# Altium PCB PCB_RocketBoardV4_2025-05-21.pcbdoc
Units mil, origin at the board's own origin, x right, y up, seen from the top; angles counter-clockwise.
Board outline 3355 x 3020 mil, 2 copper layers (Top Layer, Bottom Layer); 46 components, 75 nets, 225 pads, 69 vias.
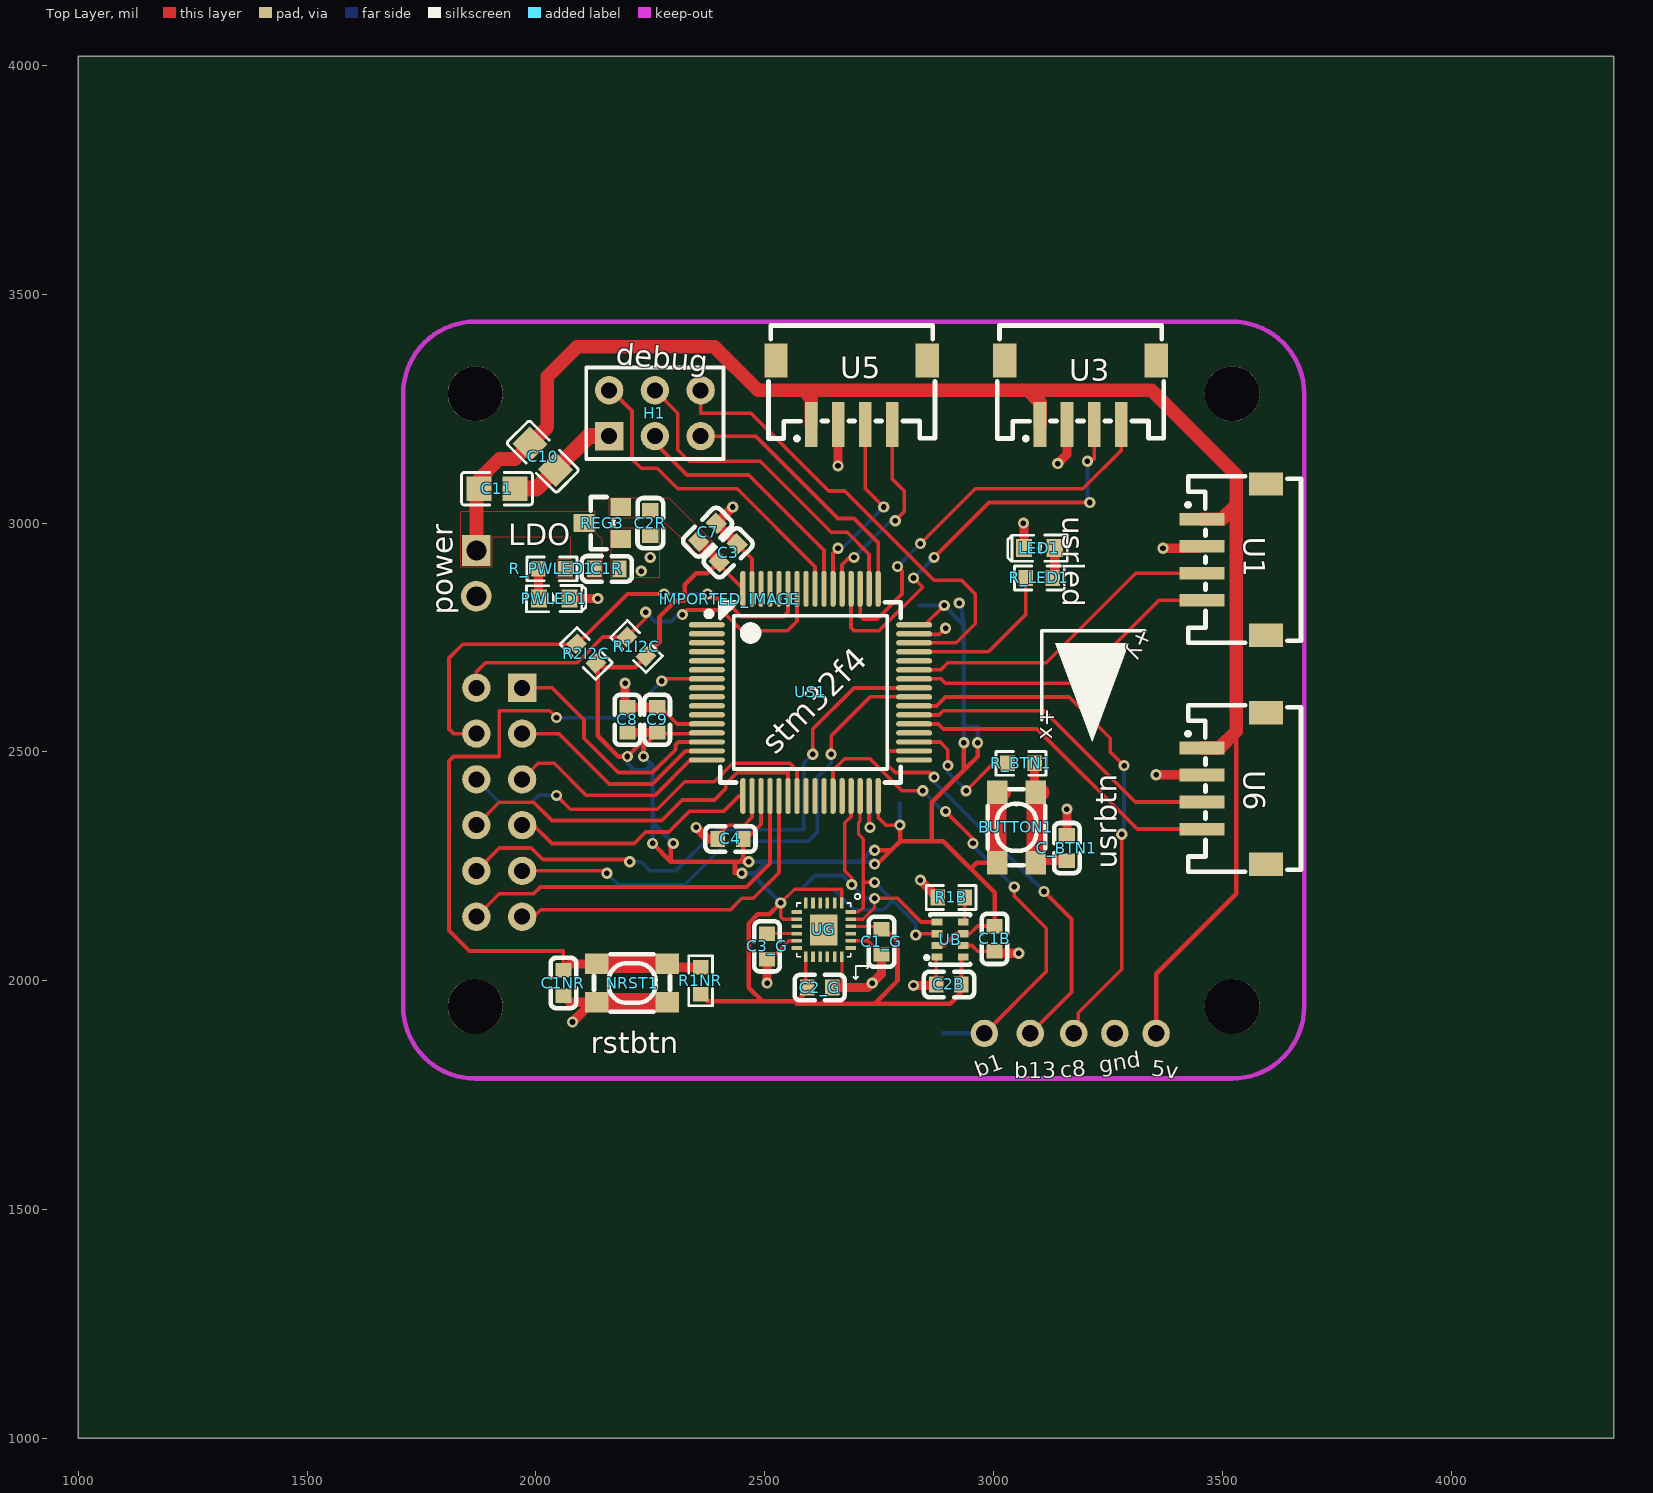
[diagram p0: Top Layer view]
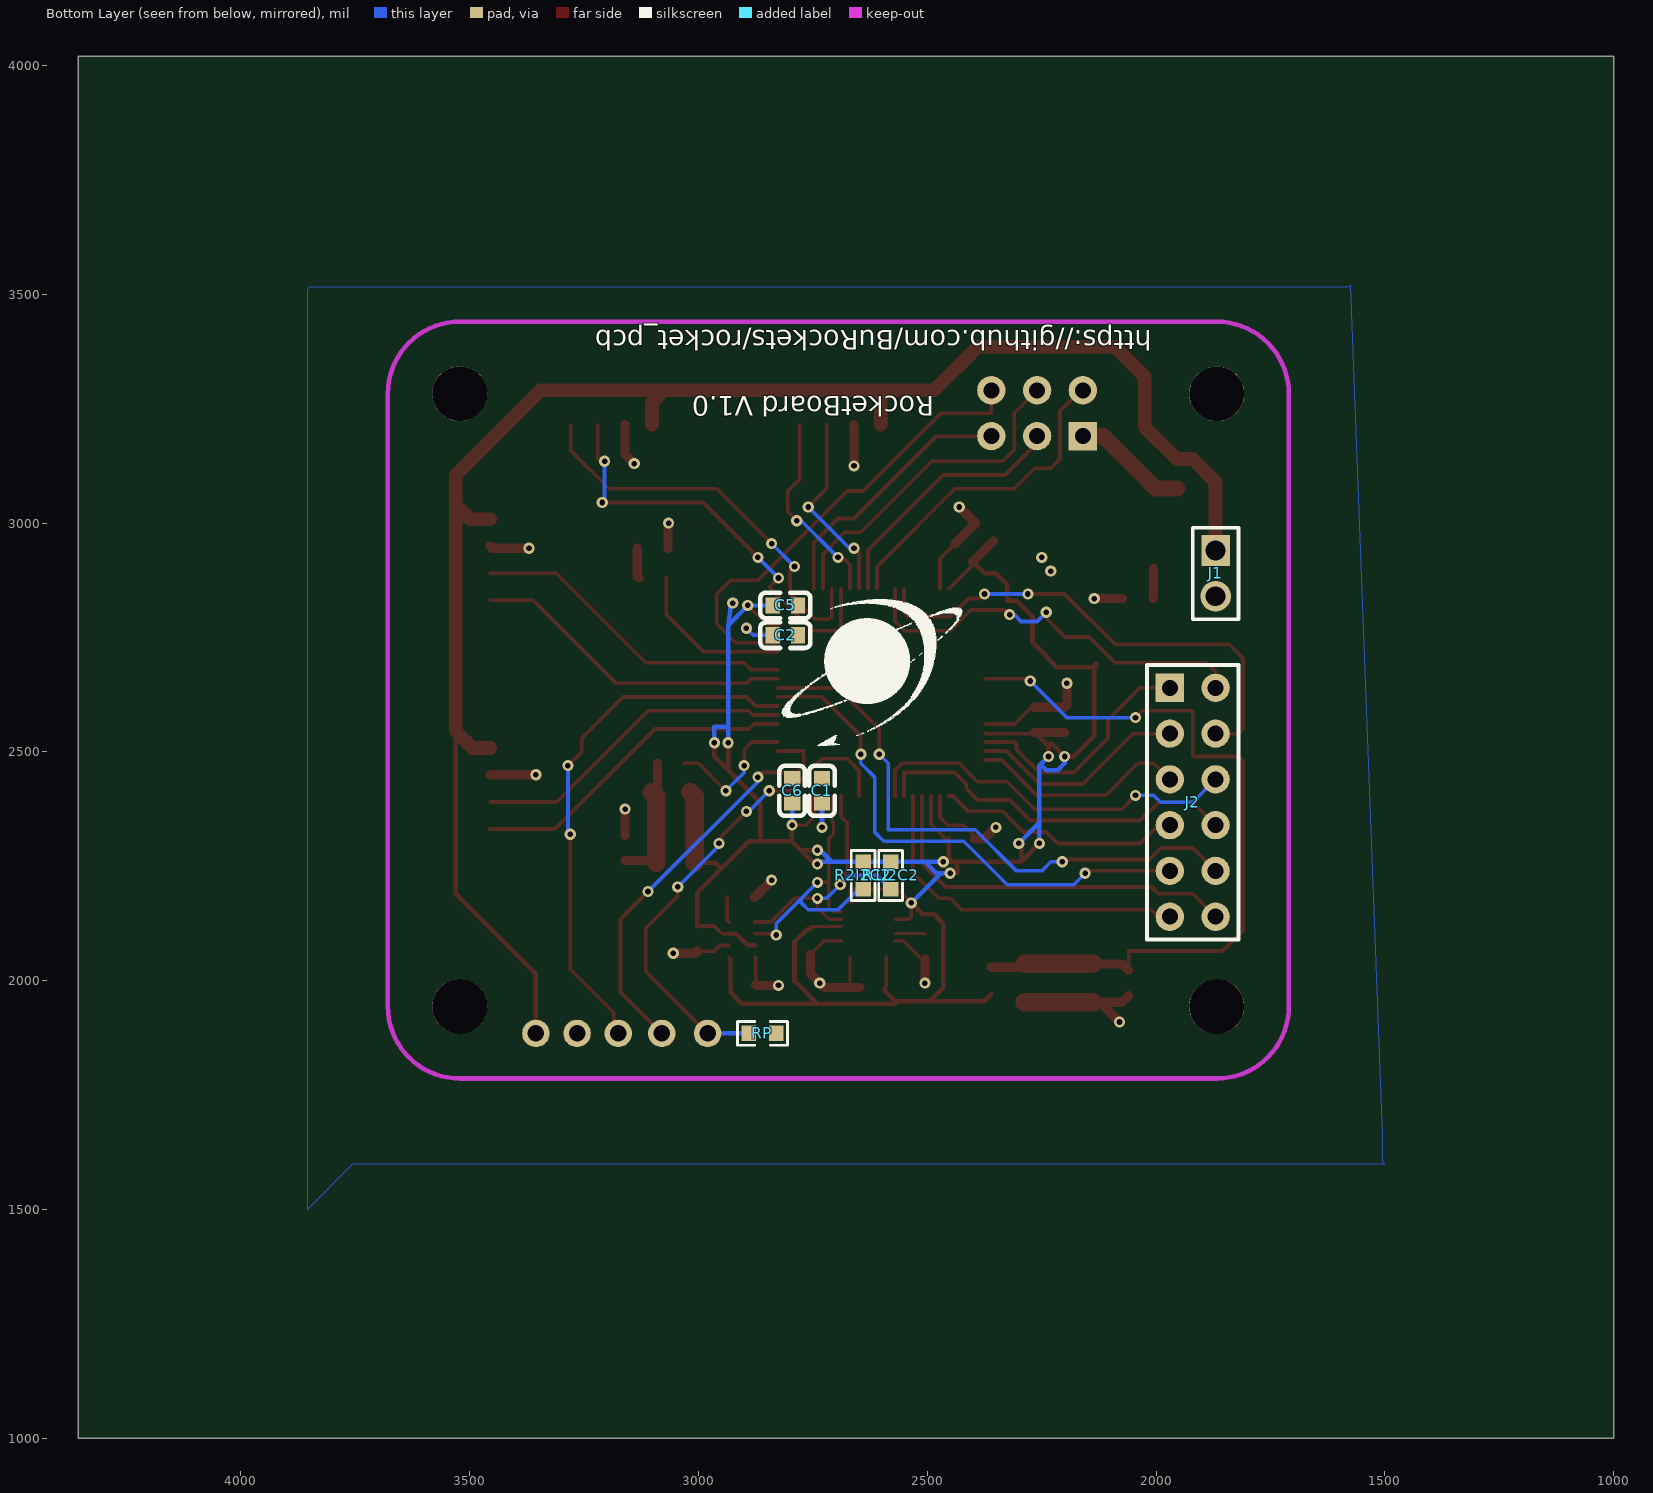
[diagram p1: Bottom Layer view, seen from below]

## Layer stack, top to bottom
Top Layer: signal copper (thickness not stored)
Dielectric: dielectric 12.6, FR-4, Dk 4.8
Bottom Layer: signal copper (thickness not stored)

## Board outline
4355,1000 1000,1000 1000,4020 4355,4020

## Components (designator, comment, footprint, x,y, rotation, side; value= is the part's Value field where it differs from the comment)
BUTTON1 "DHT-4235A" SW4-SMD-4.2X3.2X2.5MM 3050,2335 r270 top
C1 "2.2u" C0603#1 2730,2415 r270 bottom
C1_G "10n" C0603#2 2755,2085 r270 top
C1B "0.1u" C0603#2 3002.17,2091.95 r90 top
C1NR "100n" C0603#2 2060,1995 r270 top
C1R "1u" C0603#2 2155.01,2900 r180 top
C2 "2.2u" C0603#1 2810,2755 r0 bottom
C2_G "0.1u" C0603#2 2620,1985 r180 top
C2B "0.1u" C0603#2 2902.17,1991.95 r180 top
C2R "1u" C0603#2 2250.01,3000 r90 top
C3 "0.1u" C0603#2 2420,2935 r45 top
C3_G "0.1u" C0603#2 2505,2075 r270 top
C4 "0.1u" C0603#2 2425,2310 r0 top
C5 "0.1u" C0603#1 2810,2820 r180 bottom
C6 "0.1u" C0603#1 2795,2415 r90 bottom
C7 "4.7u" C0603#2 2375,2980 r45 top
C8 "0.1u" C0603#2 2200,2570 r270 top
C9 "1u" C0603#2 2265,2570 r270 top
C10 "1u" C0805 2015,3145 r315 top
C11 "0.1u" C0805 1915,3075 r180 top
C_BTN1 "0.1u" C0603#2 3160,2290 r270 top
H1 "HDR-F-2.54_2x3" HDR-F-2.54_2X3 2260,3240 r0 top
IMPORTED_IMAGE "IMPORTED_IMAGE" IMPORTED_IMAGE 2423.93,2833.13 r0 top
J1 "HDR-M-2.54_1x2" HDR-M-2.54_1X2 1870,2890 r90 bottom
J2 "HDR-M-2.54_2x6" HDR-M-2.54_2X6 1920,2390 r90 bottom
LED1 "LED-0603_R" LED0603_RED 3100,2945 r180 top
NRST1 "DHT-4235A" SW4-SMD-4.2X3.2X2.5MM 2210,1995 r0 top
PWLED1 "LED-0603_R" LED0603_RED 2040.01,2835 r0 top
R1B "10k" R0603#1 2907.17,2181.95 r0 top
R1I2C "4k7" R0603#1 2220,2730 r315 top
R1I2C2 "4k7" R0603#2 2580,2230 r270 bottom
R1NR "10k" R0603#1 2360,2000 r90 top
R2I2C "4k7" R0603#1 2110,2715 r315 top
R2I2C2 "4k7" R0603#2 2640,2230 r270 bottom
R_BTN1 "1k" R0603#1 3060,2475 r0 top
R_LED1 "10k" R0603#1 3100,2880 r180 top
R_PWLED1 "10k" R0603#1 2035.01,2900 r180 top
REG3 "XC6206P332MR-G" SEEED-SOT-23 2145.01,3000 r90 top
RP "4.7k" R0603#2 2860,1885 r180 bottom
U1 "S4B-ZR-SM4A-TF(LF)(SN)" CONN-SMD_4P-P1.50_S4B-ZR-SM4A-TF-LF-SN 3525,2920 r270 top
U3 "S4B-ZR-SM4A-TF(LF)(SN)" CONN-SMD_4P-P1.50_S4B-ZR-SM4A-TF-LF-SN 3190,3285 r0 top
U5 "S4B-ZR-SM4A-TF(LF)(SN)" CONN-SMD_4P-P1.50_S4B-ZR-SM4A-TF-LF-SN 2690,3285 r0 top
U6 "S4B-ZR-SM4A-TF(LF)(SN)" CONN-SMD_4P-P1.50_S4B-ZR-SM4A-TF-LF-SN 3525,2420 r270 top
UB "BMP280" LGA-8_L2.5-W2.0-P0.65_AMP6127 2905.04,2090.01 r180 top
UG "MPU9250-V" MPU9250 2570,2170 r270 top
US1 "STM32F405RGT6" LQFP-64_L10.0-W10.0-P0.50-LS12.0-BL 2600,2630 r270 top

## Footprints (in the part's own frame and the unit in brackets; to place one, negate y for a bottom-side part, rotate by r counter-clockwise, add the part's x,y. Pads: shape width x height; smd on the part's side, far side on the other; paste and mask are expansions set on the pad)
C0603#1 [mm]
  rect 0.8x0.9 smd paste+0 mask+0.051: 1(0.7,0) 2(-0.7,0)
  silkscreen extent -1.39,-0.71 1.39,0.71
C0603#2 [mm]
  rect 0.8x0.9 smd paste+0 mask+0.051: 1(-0.7,0) 2(0.7,0)
  silkscreen extent -1.39,-0.71 1.39,0.71
C0805 [mm]
  rect 1.41x1.35 smd paste-100 mask+0.051: 1(-1,0) 2(1,0)
  silkscreen extent -1.96,-0.9 1.96,0.9
CONN-SMD_4P-P1.50_S4B-ZR-SM4A-TF-LF-SN [mm]
  rect 0.7x2.5 smd paste+0 mask+0.051: 1(-2.25,-1.775) 2(-0.75,-1.775) 3(0.75,-1.775) 4(2.25,-1.775)
  rect 1.3x1.9 smd paste+0 mask+0.051: 5(4.2,1.775) 6(-4.2,1.775)
  silkscreen extent -4.62,-2.64 4.62,3.72
HDR-F-2.54_2X3 [mil]
  rect 62x62 hole 35 paste+0 mask+2: 1(-100,-50)
  round 62 hole 35 paste+0 mask+2: 2(-100,50) 3(0,-50) 4(0,50) 5(100,-50) 6(100,50)
  silkscreen extent -150,-100 150,100
HDR-M-2.54_1X2 [mil]
  rect 66.93x62 hole 43.31 paste+0 mask+2: 1(50,-0.01)
  round 66.93 hole 43.31 paste+0 mask+2: 2(-50,-0.01)
  silkscreen extent -100,-50 100,50
HDR-M-2.54_2X6 [mil]
  rect 62x62 hole 35 paste+0 mask+2: 1(250,50)
  round 62 hole 35 paste+0 mask+2: 2(250,-50) 3(150,50) 4(150,-50) 5(50,50) 6(50,-50) 7(-50,50) 8(-50,-50) 9(-150,50) 10(-150,-50) 11(-250,50) 12(-250,-50)
  silkscreen extent -300,-100 300,100
IMPORTED_IMAGE [mil]
LED0603_RED [mm]
  rect 0.9x1 smd paste+0 mask+0.051: 1(-0.85,0) 2(0.85,0)
  silkscreen extent -1.54,-0.73 1.75,0.73
LGA-8_L2.5-W2.0-P0.65_AMP6127 [mm]
  rect 0.6x0.4 smd paste+0 mask+0.051: 1(0.725,0.975) 2(0.725,0.325) 3(0.725,-0.325) 4(0.725,-0.975) 5(-0.725,-0.975) 6(-0.725,-0.325) 7(-0.725,0.325) 8(-0.725,0.975)
  silkscreen extent -1.1,-1.4 1.4,1.4
LQFP-64_L10.0-W10.0-P0.50-LS12.0-BL [mm]
  oval 0.3x2 smd paste+0 mask+0.051: 1(-3.75,-5.75) 2(-3.25,-5.75) 3(-2.75,-5.75) 4(-2.25,-5.75) 5(-1.75,-5.75) 6(-1.25,-5.75) 7(-0.75,-5.75) 8(-0.25,-5.75) 9(0.25,-5.75) 10(0.75,-5.75) 11(1.25,-5.75) 12(1.75,-5.75) 13(2.25,-5.75) 14(2.75,-5.75) 15(3.25,-5.75) 16(3.75,-5.75) 33(3.75,5.75) 34(3.25,5.75) 35(2.75,5.75) 36(2.25,5.75) 37(1.75,5.75) 38(1.25,5.75) 39(0.75,5.75) 40(0.25,5.75) 41(-0.25,5.75) 42(-0.75,5.75) 43(-1.25,5.75) 44(-1.75,5.75) 45(-2.25,5.75) 46(-2.75,5.75) 47(-3.25,5.75) 48(-3.75,5.75)
  oval 2x0.3 smd paste+0 mask+0.051: 17(5.75,-3.75) 18(5.75,-3.25) 19(5.75,-2.75) 20(5.75,-2.25) 21(5.75,-1.75) 22(5.75,-1.25) 23(5.75,-0.75) 24(5.75,-0.25) 25(5.75,0.25) 26(5.75,0.75) 27(5.75,1.25) 28(5.75,1.75) 29(5.75,2.25) 30(5.75,2.75) 31(5.75,3.25) 32(5.75,3.75) 49(-5.75,3.75) 50(-5.75,3.25) 51(-5.75,2.75) 52(-5.75,2.25) 53(-5.75,1.75) 54(-5.75,1.25) 55(-5.75,0.75) 56(-5.75,0.25) 57(-5.75,-0.25) 58(-5.75,-0.75) 59(-5.75,-1.25) 60(-5.75,-1.75) 61(-5.75,-2.25) 62(-5.75,-2.75) 63(-5.75,-3.25) 64(-5.75,-3.75)
  silkscreen extent -5,-5.79 5,5
MPU9250 [mm]
  rect 0.599x0.2 smd paste+0 mask+0.051: 1(0,2.5) 2(0,2.1) 3(0,1.701) 4(0,1.299) 5(0,0.9) 6(0,0.499) 13(2.99,0.5) 14(2.99,0.9) 15(2.99,1.3) 16(2.99,1.7) 17(2.99,2.099) 18(2.99,2.501)
  rect 0.2x0.599 smd paste+0 mask+0.051: 7(0.5,0) 8(0.9,0) 9(1.3,0) 10(1.7,0) 11(2.099,0) 12(2.501,0) 19(2.5,2.99) 20(2.1,2.99) 21(1.701,2.99) 22(1.299,2.99) 23(0.9,2.99) 24(0.499,2.99)
  rect 1.7x1.54 smd paste+0 mask+0.051: P$25(1.5,1.5)
  silkscreen extent -0.51,0 4.23,4
R0603#1 [mil]
  rect 31.75x34.02 smd paste-3937.01 mask+2: 1(-29.66,-0.01) 2(29.65,-0.01)
  silkscreen extent -55,-26 55,26
R0603#2 [mil]
  rect 31.75x34.02 smd paste-3937.01 mask+2: 1(29.66,0) 2(-29.65,0)
  silkscreen extent -55,-26 55,26
SEEED-SOT-23 [mil]
  rect 40x45 smd paste+0 mask+2: 1(-35,-39.99) 2(35,-39.99) 3(0,40.01)
  silkscreen extent -57,-25 57,25
SW4-SMD-4.2X3.2X2.5MM [mil]
  rect 51.2x45.3 smd paste+0 mask+2: 1(-77,42) 2(77,42) 3(-77,-42) 4(77,-42)
  silkscreen extent -83,-63 83,63

## Free pads (board coordinates)
  round 60 hole 36 paste+0 mask+2: 1(2980,1885) 2(3080,1885) 3(3175,1885) 4(3265,1885) 5(3355,1885)
  round 120.08 hole 120.08 unplated paste+0: ""(1867.48,1943.94) ""(1867.48,3282.52) ""(3521.02,1943.94) ""(3521.02,3282.52)

## Via types
v1: diameter 24.41, hole 12.2, Top Layer to Bottom Layer, tented both sides, 69 vias

## Nets (pads, with @x,y where several pads share a name; then routed paths per layer and width w, separated by ;. In a path a pad name is that pad's centre, name@x,y a point inside that pad or via, vN(x,y) a via of type N, cw(c..) or ccw(c..) an arc to the next point about the centre after c; other vN are vias at no path point)
+5V: C1R.2 C10.1 C11.2 J1.1 pad.5 R_PWLED1.1 REG3.3 U1.1 U3.1 U5.1 U6.1 | length 3750.5
  Top Layer w10: pad.5 3355,2015 3530,2190 3530,2545
  Top Layer w30: J1.1 1870,3090 1920,3140 1955,3140 2025,3210 2025,3320 2090,3385 2390,3385 2485,3290 2585,3290 ; U5.1 2601.4,3273.6 2585,3290 ; U3.1 3101.4,3263.6 3075,3290 ; U6.1 3493.6,2508.6 3530,2545 3530,3040 ; U1.1 3498.6,3008.6 3530,3040 ; 2585,3290 3075,3290 ; 3075,3290 3345,3290 3530,3105 3530,3040
A11: US1.44
ADC1IN4: J2.12 US1.20 | length 836.9
  Top Layer w8: J2.12 1920,2190 1995,2190 2010,2205 2460,2205 2511.42,2256.42 US1.20
ADC1IN10: US1.8
B0: US1.26
B1: pad.1 RP.2 US1.27 | length 1082.1
  Top Layer w8: US1.27 2649.21,2455 2649.21,2459.21 2675,2485 2730,2485 2800,2415 v1(2845,2415) ; v1(2895,2370) 2955,2310 v1(2955,2300) ; pad.1 3115,2020 3115,2115 3045,2185 v1(3045,2205)
  Bottom Layer w8: v1(2845,2415) 2890,2370 v1(2895,2370) ; v1(2955,2300) 2955,2295 v1(3045,2205)
  Bottom Layer w10: RP.2 pad.1
B2: US1.28
B5: US1.57
B8: US1.61
B9: US1.62
B12: US1.33
B13: pad.2 US1.34 | length 920.3
  Top Layer w8: US1.34@2826.37,2502.05 2770,2502.05 2770,2470 2785,2455 2860,2455 v1(2870,2445) ; pad.2 3170,1975 3170,2135 v1(3110,2195)
  Bottom Layer w8: v1(2870,2445) 2870,2435 v1(3110,2195)
B15: US1.36
BTN: R_BTN1.1 US1.35 | length 302.3
  Top Layer w8: US1.35 2883.3,2521.7 2900,2505 v1(2900,2470) ; v1(2940,2415) 3000,2475 R_BTN1.1
  Bottom Layer w8: v1(2900,2470) 2900,2455 v1(2940,2415)
C1: US1.9
C1_1: C1.1 US1.31 | length 123.1
  Top Layer w8: US1.31@2727.9,2403.6 2727.9,2335 v1(2730.01,2335)
  Bottom Layer w10: v1(2730.01,2335) C1.1
C2: US1.10
C2_1: C2.1 US1.47 | length 138.1
  Top Layer w8: US1.47@2826.37,2757.95 2827.32,2757 2879,2757 2882,2757 v1(2895,2770)
  Bottom Layer w8: C2.1 2880,2755 v1(2895,2770)
C3: US1.11
C4: US1.24
C5: US1.25
C8: pad.3 US1.39 | length 1177
  Top Layer w8: US1.39 2875.47,2600.47 2895,2620 3165,2620 3255,2530 3255,2500 v1(3285,2470) ; pad.3 3185,1895 3185,1930 3280,2025 v1(3280,2320)
  Bottom Layer w8: v1(3280,2320) 3285,2325 v1(3285,2470)
C15: US1.4
GND: C1.2 C1_G.2 C1B.1 C1NR.2 C1R.1 C2.2 C2_G.1 C2B.2 C2R.1 C3.2 C3_G.2 C4.1 C5.1 C6.1 C7.2 C8.1 C9.1 C10.2 C11.1 C_BTN1.1 H1.1 J1.2 LED1.2 NRST1.3 NRST1.4 pad.4 PWLED1.2 R1B.1 REG3.1 RP.1 U1.2 U3.2 U5.2 U6.2 UB.1 UB.7 UG.11 UG.18 UG.20 US1.12 US1.18 US1.63 | length 2526.6
  Top Layer w7: C3_G.2@2505,2047.4 2512.4,2047.4 2552.4,2087.4 UG.11 ; C2_G.1 2668.5,1985 UG.18@2668.5,2052.3 ; UG.20 2725.1,2087.3 C1_G.2@2755,2057.4
  Top Layer w8: C9.1 2272.44,2597.56 2308.9,2561.1 US1.12 ; C4.1 2397.4,2317.4 2420,2340 2455,2340 2472.1,2357.1 US1.18@2472.1,2403.6 ; C3.2 2472.05,2921.93 US1.63@2472.05,2856.37 ; C2B.2 2874.61,2049.76 UB.1 ; UB.7@2933.54,2077.21 2952.79,2077.21 2965.61,2064.39 C1B.1
  Top Layer w20: C1NR.2 2074.44,1953 NRST1.3 2123,1953 v1(2080,1910) ; PWLED1.2 v1(2135,2835) ; v1(2195,2650) 2195,2602.56 C8.1 C9.1 ; v1(2350.01,2335) 2375.01,2310 C4.1 ; v1(2430.01,3035) C7.2 C3.2 ; v1(2505,1995) C3_G.2@2505,2047.44 ; C2_G.1 2725,1985 v1(2734.8,1994.8) 2755,2015 C1_G.2@2755,2057.44 ; v1(2660,3125) 2660,3150 2660,3214.66 U5.2 ; v1(2825,1990) 2872.66,1990 C2B.2 ; v1(2840,2220) 2840,2219.46 R1B.1 ; C1B.1 3006.55,2060 v1(3055,2060) ; v1(3065,3000) 3066.54,2998.46 LED1.2 ; v1(3140,3130) 3160.46,3150.46 U3.2 ; C_BTN1.1 v1(3160,2375) ; v1(3355,2450) 3454.66,2450 U6.2 ; v1(3370,2945) 3450.58,2945 U1.2
  Top Layer w35: C11.1 2000.68,3075 C10.2 2115.68,3190 H1.1
  Top Layer w40: NRST1.3@2138,1953 NRST1.4
  other v1: 2230,2895 2250,2925
JTCK: H1.5 US1.49 | length 584.9
  Top Layer w8: H1.5 2480,3190 2660,3010 2695,3010 2747.6,2957.4 US1.49
JTDI: H1.4 US1.50 | length 738.7
  Top Layer w8: H1.4 2310,3240 2310,3160 2335,3135 2490,3135 2645,2980 2680,2980 2727.9,2932.1 US1.50@2727.9,2856.4
JTMS: H1.6 US1.46 | length 1029.5
  Top Layer w8: H1.6 2360,3240 2470,3240 2640,3070 2675,3070 2870,2875 2930,2875 2960,2845 2960,2780 2918.3,2738.3 US1.46
JTRST: H1.2 US1.56 | length 719.3
  Top Layer w8: H1.2 2165,3290 2210,3245 2210,3140 2230,3120 2265,3120 2310,3075 2439.7,3075 2609.8,2904.8 US1.56
LED: R_LED1.2 US1.45 | length 357.5
  Top Layer w8: US1.45 2988.58,2718.58 3070.34,2800.34 R_LED1.2
LED1_1: LED1.1 R_LED1.1 | length 66.6
  Top Layer w20: R_LED1.1 3133.47,2883.81 LED1.1
MISO: J2.8 US1.22 | length 818.8
  Top Layer w8: J2.8 1920,2390 1995,2390 2035,2350 2275,2350 2320,2395 2390,2395 2415,2420 2415,2430 2440,2455 2550.8,2455 US1.22
MOSI: J2.6 US1.23 | length 843.6
  Top Layer w8: v1(2045,2405) 2075,2375 2265,2375 2325,2435 2390,2435 2430,2475 2555,2475 2570.5,2459.5 US1.23
  Bottom Layer w8: J2.6 1920,2390 1990,2390 2005,2405 v1(2045,2405)
NRST: C1NR.1 NRST1.1 NRST1.2 R1NR.2 US1.7 | length 1694.1
  Top Layer w8: v1(2045,2575) 2030,2590 1920,2590 1920,2490 1820,2490 1810,2480 1810,2110 1855,2065 2060,2065 C1NR.1 ; v1(2275,2655) 2279.53,2659.53 US1.7
  Top Layer w20: C1NR.1 2074.44,2037 NRST1.1 ; NRST1.2 2294.34,2029.66 R1NR.2
  Top Layer w40: NRST1.1@2138,2037 NRST1.2
  Bottom Layer w8: v1(2045,2575) 2195,2575 v1(2275,2655)
R_BTN1_2: BUTTON1.1 BUTTON1.2 C_BTN1.2 R_BTN1.2 | length 294.5
  Top Layer w20: R_BTN1.2 3089.66,2414.34 BUTTON1.1 ; BUTTON1.2 3092,2262.44 C_BTN1.2
  Top Layer w40: BUTTON1.2 3092,2402 BUTTON1.1@3102,2412
R_PWLED1_2: PWLED1.1 R_PWLED1.2 | length 65.5
  Top Layer w20: R_PWLED1.2@2005.35,2900 2005.35,2836.19 PWLED1.1
RX1: U1.3 US1.43 | length 716.2
  Top Layer w8: US1.43 2884.2,2679.2 2900,2695 3115,2695 3310.5,2890.5 U1.3
RX3: U3.3 US1.52 | length 951.7
  Top Layer w8: US1.52 2688.6,2771.4 2695,2765 2750,2765 2845,2860 v1(2825,2880) ; v1(2870,2925) 2990,3045 v1(3210,3045) ; v1(3205,3135) 3205,3140 3219.52,3140 U3.3
  Bottom Layer w8: v1(2825,2880) v1(2870,2925) ; v1(3205,3135) 3205,3050 v1(3210,3045)
RX5: U5.3 US1.54 | length 427.3
  Top Layer w8: US1.54 2649.21,2934.21 v1(2660,2945) ; U5.3 2719.52,3075.48 v1(2760,3035)
  Bottom Layer w8: v1(2660,2945) 2670,2945 v1(2760,3035)
RX6: U6.3 US1.38 | length 715.1
  Top Layer w8: US1.38 2880.8,2580.8 2890,2590 3110,2590 3309.5,2390.5 U6.3
S$29433: 
S$29437: 
SCK: J2.11 US1.21 | length 768.4
  Top Layer w8: J2.11 1995.4,2140 2010.4,2155 2425,2155 2450,2180 2475,2180 2531.1,2236.1 US1.21
SCL: J2.2 R1I2C.1 US1.58 | length 913.6
  Top Layer w8: J2.2 1870,2675 1890,2695 2090,2695 2146,2751 R1I2C.1 ; R1I2C.1 2240,2791.95 v1(2240,2805) ; v1(2320,2800) 2330,2810 2405,2810 2450,2765 2550,2765 2570.47,2785.47 US1.58
  Bottom Layer w8: v1(2240,2805) 2260,2785 2295,2785 2310,2800 v1(2320,2800)
SCL2: R1I2C2.1 UB.4 UG.23 US1.29 | length 639.2
  Top Layer w7: UG.23 2714.57,2134.57 2740,2160 v1(2740,2180)
  Top Layer w8: US1.29 2688.6,2358.6 2675,2345 2675,2240 2690,2225 v1(2690,2210) ; v1(2740,2180) 2790,2180 2841.6,2128.4 UB.4
  Bottom Layer w8: R1I2C2.1 2609.7,2230 2670,2230 v1(2690,2210) 2720,2180 v1(2740,2180)
SDA: J2.4 R2I2C.1 US1.59 | length 1093.7
  Top Layer w8: J2.4 1820,2540 1810,2550 1810,2705 1840,2735 2090,2735 2200,2845 v1(2280,2845) ; v1(2375,2845) 2385,2835 2410,2835 2450,2795 2540,2795 2550.79,2805.79 US1.59
  Bottom Layer w8: v1(2280,2845) v1(2375,2845)
SDA2: R2I2C2.1 UB.3 UG.24 US1.30 | length 674.5
  Top Layer w7: UG.24@2687.7,2150.3 2704.7,2150.3 2715,2160 2715,2310 2705.1,2319.9 2705.1,2345.1 2708.3,2348.3 US1.30
  Top Layer w8: 2715,2215 2717.14,2215 v1(2740,2215) ; v1(2830,2100) 2832.79,2102.79 UB.3
  Bottom Layer w8: R2I2C2.1 2649.7,2200.3 2695,2155 2760,2155 2775.9,2170.9 2775.9,2179.1 ; v1(2740,2215) 2830,2125 v1(2830,2100)
SWO: H1.3 US1.55 | length 565.7
  Top Layer w8: H1.3 2260,3175 2330,3105 2465,3105 2629.5,2940.5 US1.55
T1C1: J2.10 US1.41 | length 1280.6
  Top Layer w8: J2.10 1920,2290 1990,2290 2015,2265 2200,2265 v1(2205,2260) ; v1(2605,2495) 2605,2550 2694.8,2639.8 US1.41
  Bottom Layer w8: v1(2205,2260) 2230,2260 2250,2240 2305,2240 2395,2330 2585,2330 2585,2475 v1(2605,2495)
T2C1: J2.1 US1.14 | length 537.1
  Top Layer w8: J2.1 2035,2640 2105,2570 2105,2530 2180,2455 2255,2455 2305,2505 2305,2515 2311.7,2521.7 US1.14
T2C2: J2.3 US1.15 | length 479
  Top Layer w8: J2.3 2050,2540 2160,2430 2255,2430 2327.1,2502.1 US1.15@2373.6,2502.1
T2C3: J2.5 US1.16 | length 479.2
  Top Layer w8: J2.5 2005,2475 2040,2475 2110,2405 2260,2405 2337.4,2482.4 US1.16
T2C4: J2.7 US1.17 | length 541.9
  Top Layer w8: J2.7 1995,2340 2035,2300 2215,2300 2240,2325 2290,2325 2335,2370 2410,2370 2443.6,2403.6 US1.17
T3C4: J2.9 US1.40 | length 1144.1
  Top Layer w8: J2.9 2150,2240 v1(2155,2235) ; v1(2645,2495) 2645,2535 2650,2540 2730.16,2620.16 US1.40
  Bottom Layer w8: v1(2155,2235) 2180,2210 2325,2210 2420,2305 2595,2305 2615,2325 2615,2445 2645,2475 v1(2645,2495)
TX1: U1.4 US1.42 | length 707.8
  Top Layer w8: US1.42 2885.5,2659.5 2895,2650 3180,2650 3361.4,2831.4 U1.4
TX3: U3.4 US1.51 | length 891.2
  Top Layer w8: US1.51 2708.27,2796.73 2715,2790 2745,2790 2800,2845 2800,2895 v1(2790,2905) ; v1(2840,2955) 2960,3075 3195,3075 3278.6,3158.6 U3.4
  Bottom Layer w8: v1(2790,2905) v1(2840,2955)
TX5: U5.4 US1.53 | length 437.8
  Top Layer w8: US1.53 2668.9,2908.9 2685,2925 v1(2695,2925) ; U5.4 2778.6,3096.4 2805,3070 2805,3025 v1(2785,3005)
  Bottom Layer w8: v1(2695,2925) 2775,3005 v1(2785,3005)
TX6: U6.4 US1.37 | length 723.9
  Top Layer w8: US1.37 2878.9,2561.1 2890,2550 3095,2550 3313.57,2331.43 U6.4
U1_5: U1.5
U1_6: U1.6
U3_5: U3.5
U3_6: U3.6
U5_5: U5.5
U5_6: U5.6
U6_5: U6.5
U6_6: U6.6
UB_5: R1B.2 UB.5 | length 54.9
  Top Layer w8: UB.5@2933.54,2128.39 2936.83,2131.68 R1B.2
UG_9: UG.9
UG_10: C3_G.1 UG.10 | length 65
  Top Layer w7: C3_G.1 UG.10
UG_19: UG.19
US1_2: US1.2
US1_3: US1.3
US1_5: US1.5
US1_6: US1.6
US1_60: US1.60
VDD: BUTTON1.3 BUTTON1.4 C1_G.1 C1B.2 C2_G.2 C2B.1 C2R.2 C3.1 C4.2 C5.2 C6.2 C7.1 C8.2 C9.2 R1I2C2.2 R1I2C.2 R1NR.1 R2I2C2.2 R2I2C.2 REG3.2 UB.2 UB.6 UB.8 UG.1 UG.8 UG.13 UG.22 US1.13 US1.19 US1.32 US1.48 US1.64 | length 5906.7
  Top Layer w7: UG.8 2540.45,2134.55 2535,2140 v1(2535,2170) 2565,2200 2668.4,2200 UG.1 ; UG.13 2589.68,1987.76 C2_G.2 ; UG.22 2755,2118.8 C1_G.1
  Top Layer w8: C9.2 2265,2540 2372.2,2540 US1.13 ; C3.1 2400.51,2908.22 US1.64 ; C4.2 2460,2310 2491.7,2341.7 US1.19 ; US1.32 2747.6,2357.4 2765,2340 v1@2795.3,2340 ; US1.48 2849.64,2777.64 v1(2892.01,2820) ; C2B.1 2929.73,2047.8 UB.8@2933.54,2051.61 ; UB.6@2933.5,2102.8 2947.8,2102.8 2965.5,2119.5 C1B.2
  Top Layer w10: R2I2C.2 2135,2690 2135,2535 2180,2490 v1(2200,2490) 2227.44,2517.44 2235,2517.44 ; R2I2C.2 2131,2685 2216.9,2685 R1I2C.2 2241,2711 2270,2740 2270,2795 2305,2830 2325,2830 2325,2865 2350,2890 2375,2890 C3.1 ; v1(2235,2490) 2235,2512.44 C9.2 ; v1(2255,2300) 2295,2260 ; v1(2300,2300) 2295,2295 2295,2260 ; R1NR.1@2360,1970.34 2375.34,1955 2495,1955 ; v1(2450,2235) 2435,2235 2435,2260 2444.99,2260 ; 2450,2260 v1(2465,2260) ; C4.2 2452.56,2267.57 2444.99,2260 ; v1(2535,2170) 2510,2145 2485,2145 2465,2125 2465,1985 2495,1955 ; C2_G.2 2592.4,1977.4 2570,1955 ; v1(2740,2255) 2745.8,2255 2775.8,2285 ; v1(2740,2285) 2775.8,2285 ; C1_G.1 2762.4,2112.6 2790,2085 2790,2000 2740,1950 ; 2795,2305 2884.67,2305 ; v1(2795.36,2340) 2795.8,2305 2775.8,2285 ; 2846,2305 2865,2305 2865,2390 2935,2460 ; UB.2 2892.2,2077.2 2917.8,2102.8 UB.6@2933.5,2102.8 ; 2884.7,2305 2890,2305 3002.2,2192.8 C1B.2 ; C2B.1@2929.7,1992 2929.7,1974.7 2905,1950 2740,1950 ; v1(2935,2520) 2935,2460 ; 2950.24,2244.75 2963.49,2258 BUTTON1.4 ; v1(2965,2520) 2965,2490 2935,2460 ; 2295,2260 2444.99,2260 ; 2495,1955 2570,1955 ; 2570,1955 2570,1950 2740,1950
  Top Layer w20: C8.2 C9.2 ; C7.1 C3.1
  Top Layer w40: BUTTON1.4 3008,2402 BUTTON1.3@3018,2412
  Bottom Layer w8: C5.2 v1(2892.01,2820)
  Bottom Layer w10: v1(2200,2490) 2200,2475 2215,2460 2240,2460 2249.41,2469.41 2255.59,2469.41 ; v1(2235,2490) 2255,2470 v1(2255,2300) ; 2255,2348.39 2255,2345 v1(2300,2300) ; v1(2465,2260) 2740,2260 v1(2740,2255) ; 2518.6,2260 2505,2260 2480,2235 v1(2450,2235) 2470,2235 v1(2535,2170) ; 2708.49,2260 2733.49,2285 v1(2740,2285) ; C6.2 v1@2795.35,2340 ; v1(2892.01,2820) 2935,2777.01 v1(2935,2520) ; v1(2925,2825) 2930,2820 2930,2810 2935,2775 ; 2935,2555 2965,2555 2965,2550 v1(2965,2520)
pads on no net: UG.2 UG.3 UG.4 UG.5 UG.6 UG.7 UG.12 UG.14 UG.15 UG.16 UG.17 UG.21 UG.P$25 US1.1

## Polygon pours and split planes (outlines as drawn)
GND on Bottom Layer (solid): 1575,3520 1580,3515 3850,3515 3855,3510 3855,1500 3755,1600 1500,1600 1505,1605 1505,1660
+5V on Top Layer (solid): 2045.01,2970 2075.01,2970 2075.01,2920 2045.01,2920 2045.01,2880 2110.01,2880 2145.01,2880 2145.01,2920 2145.01,2965 2130.01,2980 2130.01,3025 2075.01,3025 2005.01,3025 1835,3025 1835,2975 1835,2905 1905,2905 1905,2950 1905,2970
GND on Top Layer (solid): 2270,2990 2270,2950 2270,2880 2165.01,2880 2165.01,2990
VDD on Top Layer (solid): 2160.01,3055 2290,3055 2385,2960 2355,2930 2315,2970 2270,3010 2160.01,3010

## Keep-outs
Keep-Out Layer:
  lines w10: 1710,1943.94 ccw(c1867.48,1943.94) 1867.48,1786.46 ; 1710,3282.52 cw(c1867.48,3282.52) 1867.48,3440 ; 3521.02,1786.46 ccw(c3521.02,1943.94) 3678.5,1943.94 ; 3521.02,3440 cw(c3521.02,3282.52) 3678.5,3282.52

## Other copper
Bottom Layer:
  pour cut-out net VDD: 2705,2275 2689.66,2259.66 2580,2259.66 2585,2264.66 2585,2300 2620,2335 2620,2425 2700,2425 2715,2410 2715,2320 2730,2305 2730,2295 2720,2285
  pour cut-out: 2242.5,2247.5 2245,2245 2350,2245 2350,2305 2345,2310 2225,2310 2210,2295 2210,2280
  pour cut-out: 2565,2295 2560,2290 2560,2270 2555,2275 2470,2275 2435,2240 2435,2215 2425,2215 2355,2215 2435,2295
  pour cut-out: 2700,2420 2825,2420 2825,2310 2700,2310
  pour cut-out: 2220,2250 2245,2225 2250,2225 2240,2215 2210,2215 2185,2215 2170,2230 2170,2240 2170,2260 2190,2260 2195,2255 2220,2255
  pour cut-out net C2_1: 2815,2800 2815,2775 2855,2775 2860,2775 2870,2765 2875,2770 2885,2785 2895,2795 2895,2800 2890,2805 2880,2805 2875,2810 2815,2810

## Silkscreen, mask and mechanical layers (free items; w line width, h text height)
Top Overlay:
  region: 3135,2737.5 3295,2737.5 3215,2522.5
  lines w8 net S$29433: 3105,2765 3330,2765
  lines w8 net S$29437: 3105,2570 3105,2765
  text "debug" at 2172.94,3346.47 h47.24 r355
  text "usrled" at 3151.38,3015 h47.24 r270
  text "LDO" at 1940,2951.38 h47.24
  text "power" at 1818.62,2800 h47.24 r90
  text "stm32f4" at 2523.1,2491.9 h51.18 r45
  text "usrbtn" at 3268.62,2245 h47.24 r90
  text "rstbtn" at 2120,1841.38 h47.24
  text "gnd" at 3232.77,1797.5 h35.43 r9
  text "5v" at 3342.84,1792.42 h35.43 r353
  text "b1" at 2966.06,1788.35 h35.43 r20
  text "b13" at 3045,1787.28 h35.43
  text "c8" at 3146.54,1787.35 h35.43 r5
Bottom Overlay:
  text "https://github.com/BuRockets/rocket_pcb" at 2010,3421.65 h43.31 r180
  text "RocketBoard V1.0" at 2485,3276.65 h43.31 r180

## Text inside footprints (layer, text, board x,y; h text height)
UG: Top Overlay "+y" at 3318.69,2771.92 h35.43 r247; Top Overlay "+x" at 3102.28,2595 h35.43 r270